# Altium PCB dalang-v1.3_20211125.PcbDoc (part 3 of 5)
Units mil, origin at the board's own origin, x right, y up, seen from the top; angles counter-clockwise.
Board outline 4000 x 3999.92 mil, 4 copper layers (Top, gnd, vcc, Bottom), stack 35.4 mil thick; 365 components, 335 nets, 1640 pads, 1414 vias.
Unrouted connection lines stored in the file: 894.
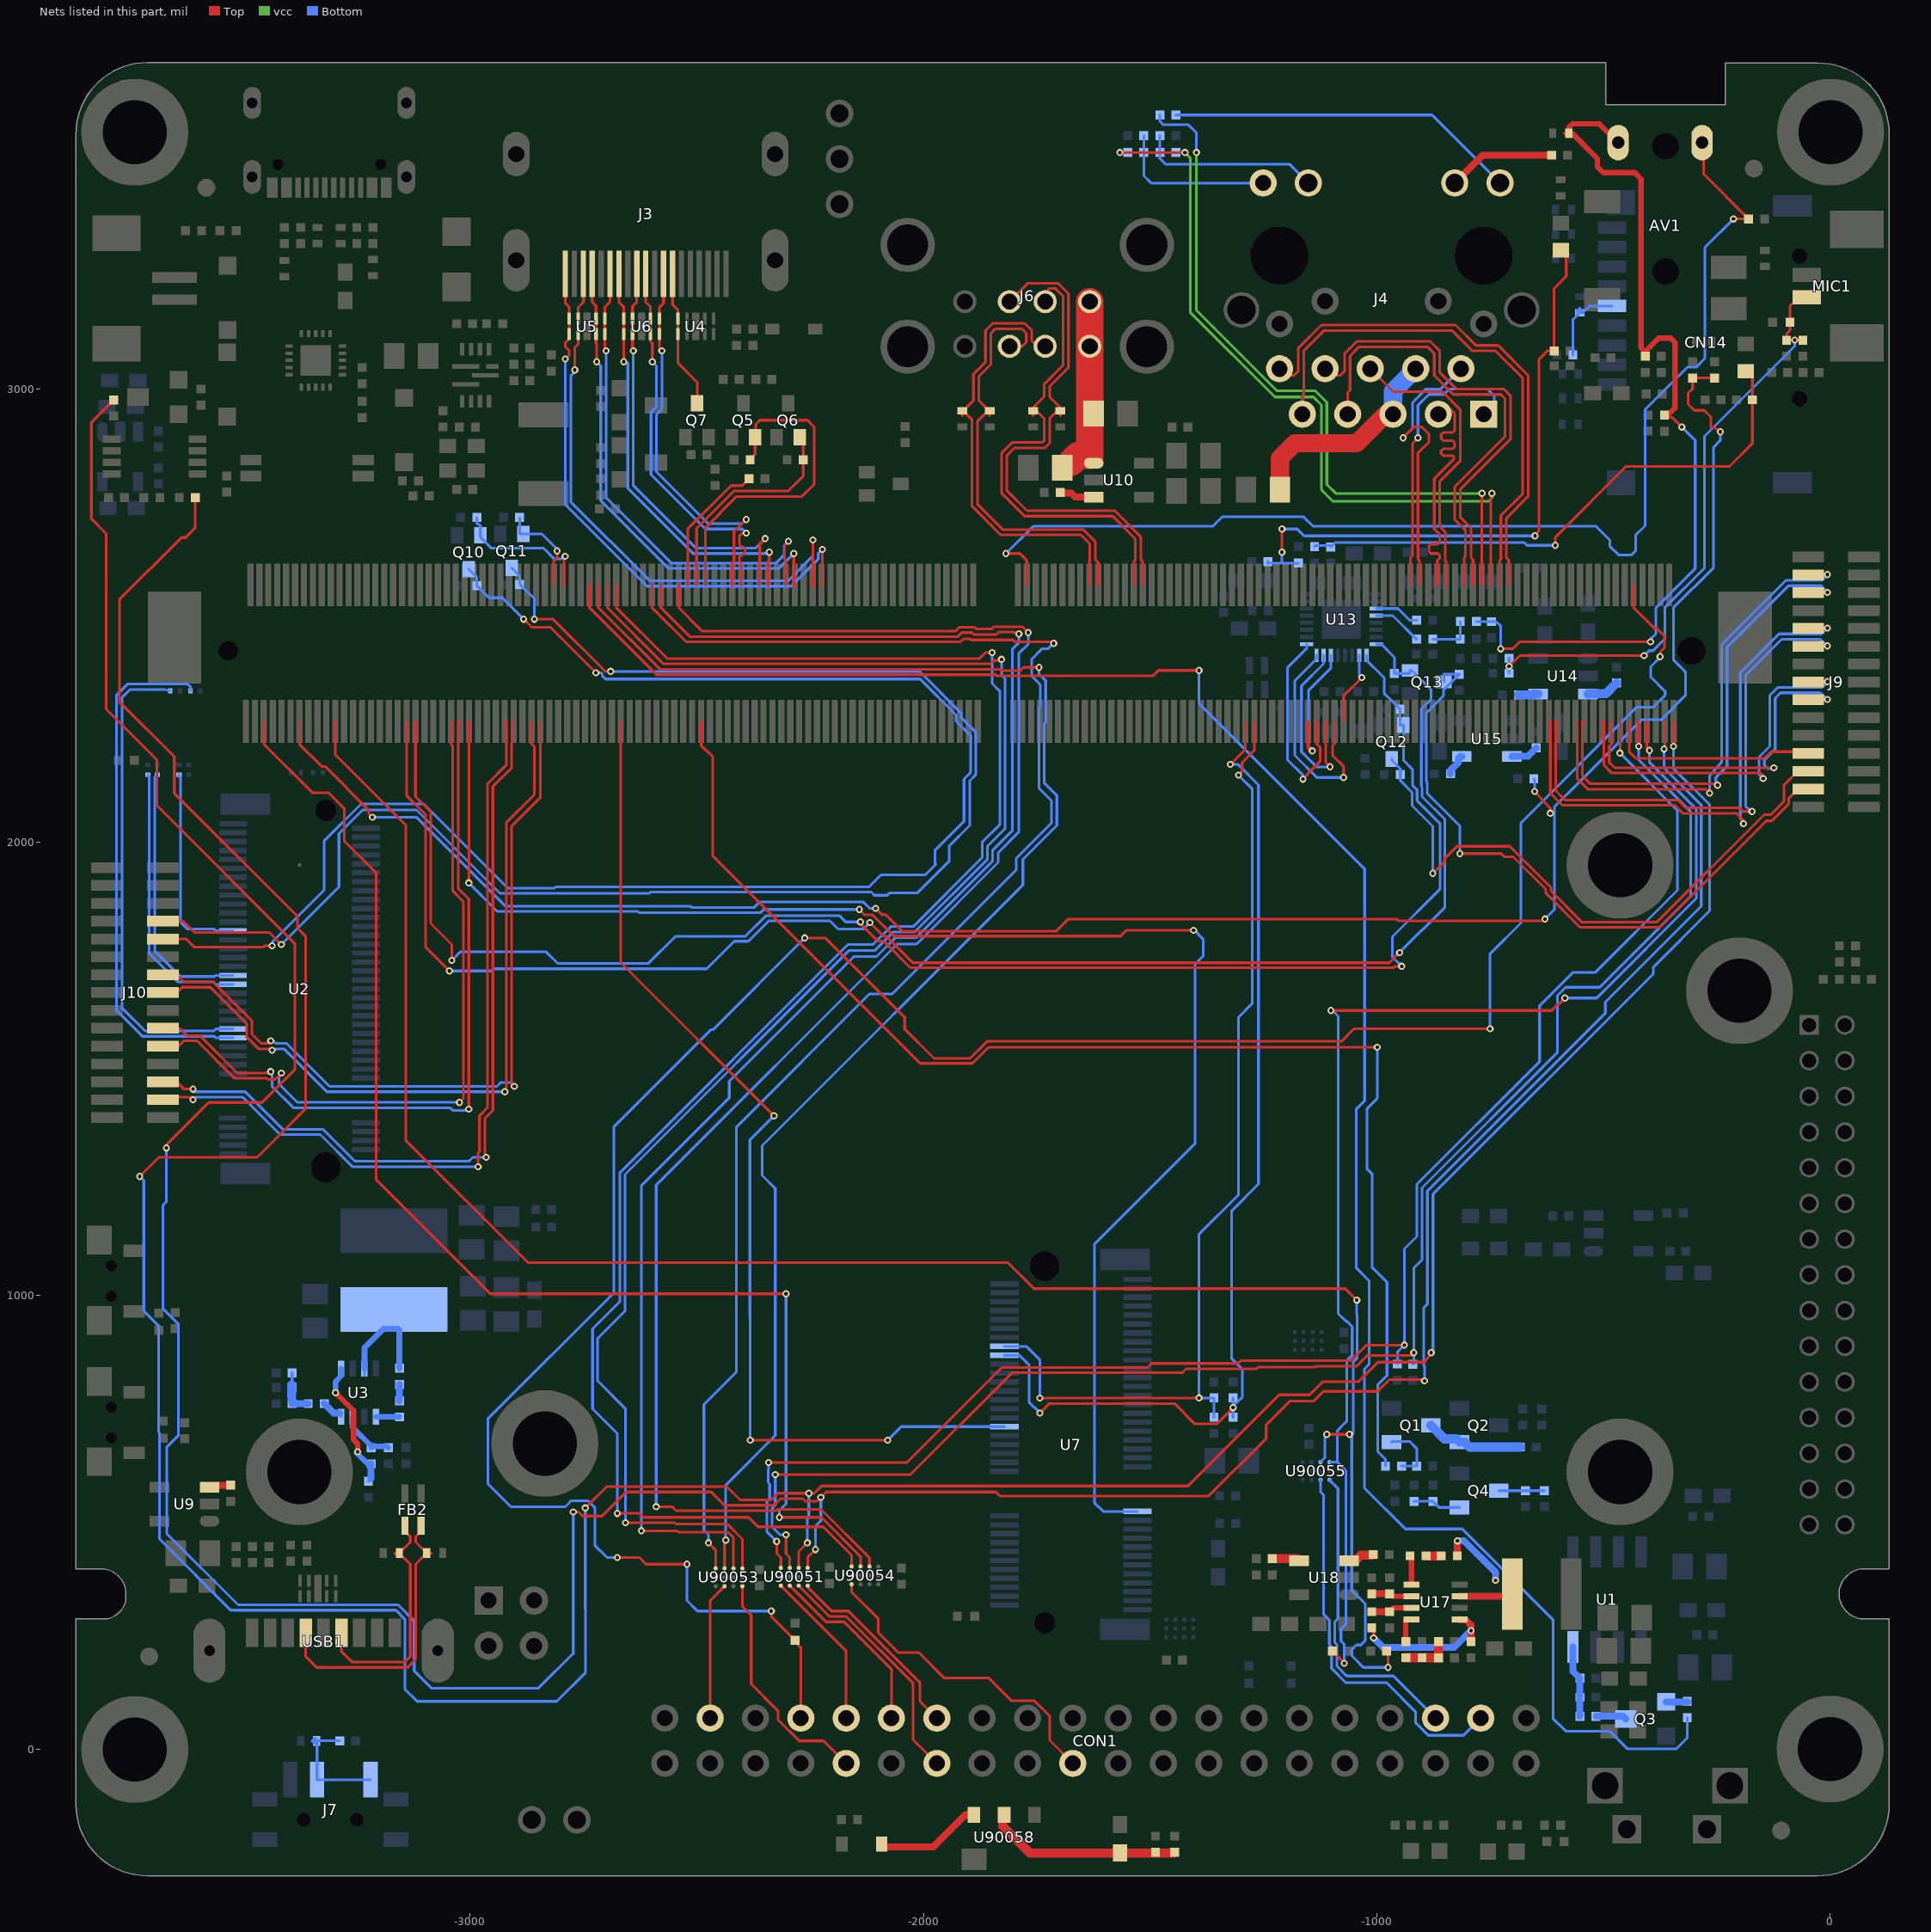
[diagram p4: the nets of this part, all layers, seen from the top]

## Via types
v1: diameter 15.75, hole 7.87, Top to Bottom, 1414 vias

## Nets (pads, with @x,y where several pads share a name; then routed paths per layer and width w, separated by ;. In a path a pad name is that pad's centre, name@x,y a point inside that pad or via, vN(x,y) a via of type N, cw(c..) or ccw(c..) an arc to the next point about the centre after c; other vN are vias at no path point) (continued)
GPIO2_A2: U90053.C3 | length 3533.2
  Top w5.91: v1(-2622.05,481.3) -2543.67,481.3 -2540.72,478.35 -2431.36,478.35 -2419.07,466.06 U90053.C3@-2419.07,398.37 ; -2579.13,2567.72 -2579.13,2517.52 -2515.44,2453.83 -1923.74,2453.83 -1914.97,2462.6 -1893,2462.6 -1888.98,2458.58 -1838.95,2458.58 -1833.87,2463.66 -1802.37,2463.66 -1801.31,2462.6 -1789.37,2462.6 v1(-1789.37,2459.65)
  Bottom w5.91: v1(-2622.05,481.3) -2622.05,1242.71 -2428.35,1436.41 -2428.35,1473.04 -2153.35,1748.03 -2103.38,1748.03 -2062.04,1789.37 -2016.65,1789.37 -1847.24,1958.78 -1847.24,1982.61 -1803.54,2026.31 -1803.54,2426.42 -1789.37,2440.59 v1(-1789.37,2459.65)
GPIO2_A3: U90053.A3 | length 3423.2
  Top w5.91: -2598.82,2567.72 -2598.82,2517.52 -2523.32,2442.02 -1918.41,2442.02 -1911.53,2448.9 -1896.99,2448.9 -1894.49,2446.41 -1802.37,2446.41 -1797.9,2441.93 -1712.6,2441.93 v1(-1712.6,2438.98) ; v1(-2474.41,454.72) -2458.44,438.75 U90053.A3@-2458.44,398.37
  Bottom w5.91: v1(-2474.41,454.72) -2474.41,472.57 -2484.33,482.49 -2484.33,759.98 -2412.4,831.9 -2412.4,1371.98 -2119.03,1665.35 -2068.7,1665.35 -1795.28,1938.77 -1795.28,1964.67 -1717.44,2042.51 -1717.44,2091.81 -1745.13,2119.49 -1745.13,2296.97 -1742.17,2299.92 -1742.17,2347.5 -1760.91,2366.23 -1760.91,2404.19 -1737.93,2427.17 -1724.41,2427.17 v1(-1712.6,2438.98)
GPIO2_A4: U90054.C3 | length 3687.5
  Top w5.91: v1(-2589.57,534.45) -2554.13,534.45 -2545.28,525.59 -2324.18,525.59 -2321.23,528.54 -2225.94,528.54 -2119.09,421.7 U90054.C3@-2119.09,402.56 ; -2539.76,2567.72 -2539.76,2517.52 -2487.89,2465.64 -1929.81,2465.64 -1921.04,2474.41 -1886.84,2474.41 -1882.82,2470.39 -1850.07,2470.39 -1844.99,2475.47 -1781.57,2475.47 v1(-1768.7,2462.6)
  Bottom w5.91: v1(-2589.57,534.45) -2589.57,1243.91 -2057.89,1775.59 -2015.01,1775.59 -1835.04,1955.56 -1835.04,1977.07 -1789.76,2022.35 -1789.76,2416.18 -1768.7,2437.25 v1(-1768.7,2462.6)
GPIO2_A6_D: U90054.B3 | length 2878.9
  Top w5.91: -3455.12,2266.54 -3455.12,2216.34 -3348.23,2109.45 -3312.63,2109.45 -3277.17,2073.98 -3277.17,2002.25 -3207.09,1932.17 -3207.09,1255.57 -2955.45,1003.94 v1(-2303.15,1003.94) ; v1(-2317.91,510.83) -2224.93,510.83 -2138.78,424.68 U90054.B3@-2138.78,402.56
  Bottom w5.91: v1(-2317.91,510.83) -2317.91,525.94 -2303.15,540.7 v1(-2303.15,1003.94)
GPIO2_B4_U: C42.1 R46.2 R47.2 | length 4597.8
  Top w5.91: -2073,1830 -2047.13,1804.13 -1830.71,1804.13 ; v1(-651.57,2112.2) -617.13,2074.8 v1(-617.13,2063.98) ; -265.75,2940.94 -262.59,2937.79 -262.59,2915.14 -255.7,2915.14 v1(-242.13,2905.51)
  Top w6: -3376.38,2266.54 -3376.38,2216.29 -3327.41,2167.32 -3320.06,2167.32 -3223.58,2070.84 -3223.58,2063.15 v1(-3215.55,2055.12) ; v1(-2105.32,1854.33) -2091.43,1840.44 -2083.44,1840.44 -2073,1830 ; -1830.71,1804.13 -1706.69,1804.13 -1680.12,1830.71 -956.29,1830.71 -952.05,1826.47 -635.04,1826.47 -630.8,1830.71 v1(-628.94,1830.71) ; -265.75,2940.94 -277.56,2952.76 -299.21,2952.76 -312.99,2966.54 -312.99,2990.45 -303,3000.45 C42.1@-303,3024.28 R46.2@-255,3024.28
  Bottom w5.91: R47.2@-653.54,2139.76 -651.57,2137.8 v1(-651.57,2112.2) ; v1(-628.94,1830.71) -608.27,1851.38 -608.27,2061.02 ; v1(-617.13,2063.98) -608.27,2061.02 ; -554.33,2131.89 -608.27,2077.95 -608.27,2061.02
  Bottom w6: v1(-3215.55,2055.12) -3118.07,2055.12 -2921.61,1858.66 -2513.29,1858.66 -2510.53,1855.91 -2374.18,1855.91 -2361.98,1868.11 -2132.5,1868.11 -2118.72,1854.33 v1(-2105.32,1854.33) ; -554.33,2131.89 -415.94,2270.27 -372.44,2270.27 -318.9,2323.82 -318.9,2376.21 -345.47,2402.78 -345.47,2517.37 -256.89,2605.95 -256.89,2871.44 -242.13,2886.2 v1(-242.13,2905.51)
GPIO3_D4/I2S0-SDI1: CON1.22 U90054.A1 | length 711.2
  Top w5.91: U90054.A1@-2158.46,363.19 -2158.46,345.97 -2099.41,286.91 -2099.41,256.19 -2055.82,212.6 -2010.08,212.6 -1953.98,156.5 -1855.7,156.5 -1805.5,106.3 -1754.99,106.3 -1721.46,72.77 -1721.46,19.09 CON1.22@-1670.47,-31.89
GPIO3_D4/I2S0_SDI1: U90054.A3 | length 3872.8
  Top w5.91: -2677.56,2567.72 -2677.56,2517.52 -2565.38,2405.34 -1876.14,2405.34 -1863.17,2418.31 v1(-1848.43,2418.31) ; v1(-2675.2,519.68) -2626.48,519.68 -2617.62,510.83 -2385.36,510.83 -2364.69,490.16 -2220.96,490.16 -2158.46,427.66 U90054.A3@-2158.46,402.56
  Bottom w5.91: v1(-2675.2,519.68) -2675.2,695.68 -2729.92,750.4 -2729.92,926.74 -2669.29,987.37 -2669.29,1271.51 -2166.4,1774.41 -2111.43,1774.41 -2071.66,1814.17 -2022.7,1814.17 -1870.08,1966.79 -1870.08,2000.68 -1831.1,2039.66 -1831.1,2332.8 -1848.43,2350.12 v1(-1848.43,2418.31)
GPIO3_D5/I2S0-SDI2: CON1.32 U90053.D1 | length 517.1
  Top w5.91: U90053.D1@-2399.38,359 -2399.38,314.74 -2379.92,295.28 -2379.92,143.39 -2320.87,84.33 -2320.87,64.83 -2273.75,17.72 -2220.08,17.72 CON1.32@-2170.47,-31.89
GPIO3_D5/I2S0_SDI2: U90053.D3 | length 3680.3
  Top w5.91: -2697.24,2567.72 -2697.24,2517.52 -2573.25,2393.53 -1852.53,2393.53 -1845.47,2400.59 -1839.57,2400.59 -1838.58,2401.57 -1827.76,2401.57 v1(-1827.76,2403.54) ; v1(-2657.48,499.02) -2548.23,499.02 -2545.28,496.06 -2432.37,496.06 -2399.38,463.07 U90053.D3@-2399.38,398.37
  Bottom w5.91: v1(-2657.48,499.02) -2657.48,750.89 -2718.83,812.23 -2718.83,905.48 -2658.27,966.04 -2658.27,1267.11 -2164.36,1761.02 -2107.6,1761.02 -2066.26,1802.36 -2019.08,1802.36 -1858.66,1962.79 -1858.66,1991.65 -1820.08,2030.23 -1820.08,2361.12 -1827.76,2368.79 v1(-1827.76,2403.54)
GPIO3_D6/I2S0-SDI3: CON1.37 U90053.B1 | length 304
  Top w5.91: CON1.37@-2470.47,68.11 -2470.47,327.28 U90053.B1@-2438.75,359
GPIO3_D6/I2S0_SDI3: U90053.B3 | length 3416.4
  Top w5.91: -2716.93,2567.72 -2716.93,2517.52 -2581.08,2381.67 -1830.63,2381.67 -1827.82,2378.86 -1786.13,2378.86 -1779.16,2385.83 v1(-1745.08,2385.83) ; U90053.B3@-2438.75,398.37 -2438.75,457.9 v1(-2436.02,460.63)
  Bottom w5.91: v1(-2436.02,460.63) -2436.02,582.19 -2326.77,691.44 -2326.77,1236.27 -2355.83,1265.33 -2355.83,1330.84 -1780.51,1906.16 -1780.51,1962.28 -1705.63,2037.16 -1705.63,2103.21 -1733.32,2130.89 -1733.32,2261.56 -1730.32,2264.56 -1730.32,2356.29 -1745.08,2371.06 v1(-1745.08,2385.83)
GPIO4_D3_1V8: R15.1 | length 4572.9
  Top w6: -2736.61,2567.72 -2736.61,2517.47 -2588.9,2369.76 -1840.81,2369.76 -1838.06,2367 -1494,2367 -1482,2379 v1(-1392,2379)
  Bottom w6: v1(-1392,2379) -1392,2306.34 -1026.77,1941.11 -1026.77,1430.02 -1044.88,1411.91 -1044.88,1060.99 -1016.93,1033.04 -1016.93,848.65 -1027.17,838.41 -1027.17,575.72 -936.88,485.43 -811.51,485.43 -611.02,284.94 -611.02,67.47 -582.93,39.37 -486.14,39.37 -447.17,0.39 -338.79,0.39 -315,24.19 R15.1@-315,69.28
GPIO4_D5: CON1.33 ED25.1 | length 5492.5
  Top w5.91: v1(-2675.2,422.24) -2626.48,422.24 -2611.71,407.48 v1(-2521.65,407.48) ; v1(-2335.63,304.13) -2335.63,291.8 ED25.1@-2283.23,239.41 -2278.43,234.6 -2278.43,231.65 -2270.47,223.69 CON1.33@-2270.47,68.11 ; v1(-2261.81,1788.98) -2216.59,1788.98 -2041.34,1613.72 -2041.34,1588.21 -1976.36,1523.23 -1897.39,1523.23 -1859.6,1561.02 -1078.13,1561.02 -1050.57,1588.58 v1(-750,1588.58) ; -433.46,2567.72 -433.46,2517.52 -388.78,2472.83 -383.46,2472.83 -365.33,2454.7 -365.33,2429.16 -374.02,2420.47 -374.02,2409.45 v1(-375,2409.45)
  Bottom w5.91: v1(-2675.2,422.24) -2697.81,422.24 -2724.8,449.24 -2724.8,532.62 -2739.82,547.64 -2776.67,547.64 -2790.06,534.25 -2909.82,534.25 -2961.02,585.46 -2961.02,728.09 -2682.68,1006.44 -2682.68,1373.17 -2469.28,1586.57 -2464.22,1586.57 v1(-2261.81,1788.98) ; v1(-2521.65,407.48) -2521.65,327.3 -2498.49,304.13 v1(-2335.63,304.13) ; v1(-750,1588.58) -750,1753.94 -682.09,1821.85 -682.09,2042.53 -426.29,2298.33 -389.76,2298.33 -363.73,2324.36 -363.73,2332.68 -395.67,2364.61 -395.67,2387.09 -374.16,2408.6 -373.31,2409.45 v1(-375,2409.45)
HDMI_PORT_CEC: J3.13 Q7.3 U4.1 U4.10 | length 307.8
  Top w6: J3.13@-2553.62,3253.6 -2553.62,3186 -2541.37,3173.75 U4.10@-2541.37,3155.22 U4.1@-2541.37,3120.78 -2541.37,3057 -2499,3014.63 Q7.3@-2499,2968.4
HDMI_TX0N: J3.9 U6.2 U6.9 | length 935.9
  Top w6: v1(-2640,3084) -2641.69,3085.68 U6.2@-2641.69,3120.78 U6.9@-2641.69,3155.22 -2641.69,3182.68 -2632.36,3192 J3.9@-2632.36,3253.6 ; -2362.6,2567.72 -2362.6,2619 -2361,2620.6 -2361,2658 v1(-2349,2670)
  Bottom w6: v1(-2640,3084) -2640,2787 -2502,2649 -2370,2649 v1(-2349,2670)
HDMI_TX0P: J3.7 U6.1 U6.10 | length 932.3
  Top w6: J3.7@-2671.73,3253.6 -2671.73,3192 -2661.37,3181.64 U6.10@-2661.37,3155.22 U6.1@-2661.37,3120.78 -2661,3118.15 v1(-2661,3060) ; -2342.91,2567.72 -2342.91,2619 -2340,2621.91 v1(-2340,2640)
  Bottom w6: v1(-2661,3060) -2661,3057 -2652,3057 -2652,2781 -2508,2637 -2343,2637 v1(-2340,2640)
HDMI_TX1N: J3.6 U5.5 U5.6 | length 1094.2
  Top w6: v1(-2700,3084) -2702.63,3086.63 U5.5@-2702.63,3120.78 U5.6@-2702.63,3155.22 -2702.63,3180.78 -2691.41,3192 J3.6@-2691.41,3253.6 ; -2303.54,2567.72 -2303.54,2622 -2306.54,2625 -2306.54,2655.46 v1(-2298,2664)
  Bottom w6: v1(-2700,3084) -2700,2760 -2556,2616 -2325,2616 -2307,2634 -2307,2655 v1(-2298,2664)
HDMI_TX1P: J3.4 U5.4 U5.7 | length 1086.7
  Top w6: J3.4@-2730.78,3253.6 -2730.78,3192 -2722.32,3183.53 U5.7@-2722.32,3155.22 U5.4@-2722.32,3120.78 -2722.32,3100.32 -2721,3099 v1(-2721,3060) ; v1(-2286,2637) -2286,2563.86 -2283.86,2567.72
  Bottom w6: v1(-2721,3060) -2712,3051 -2712,2754 -2562,2604 -2319,2604 v1(-2286,2637)
HDMI_TX2N: J3.3 U5.2 U5.9 | length 1289.4
  Top w6: v1(-2769,3042) -2769,3091.68 -2761.69,3099 U5.2@-2761.69,3120.78 U5.9@-2761.69,3155.22 -2761.69,3180 -2749.69,3192 -2749.69,3252.81 J3.3@-2750.47,3253.6 ; -2244.49,2567.72 -2244,2562.2 v1(-2244,2667)
  Bottom w6: v1(-2769,3042) -2769,3037.96 -2778,3028.96 -2778,2751 -2604,2577 -2298,2577 -2244,2631 v1(-2244,2667)
HDMI_TX2P: J3.1 U5.1 U5.10 | length 1286.6
  Top w6: v1(-2790,3066) -2781.37,3074.63 -2781.37,3084.37 -2790,3093 -2790,3102 -2781.37,3110.63 U5.1@-2781.37,3120.78 U5.10@-2781.37,3155.22 -2781.37,3180.16 -2789.84,3188.63 J3.1@-2789.84,3253.6 ; -2224.8,2567.72 -2223,2566.52 v1(-2223,2646)
  Bottom w6: v1(-2790,3066) -2790,2745 -2610,2565 -2292,2565 -2232,2625 -2232,2637 v1(-2223,2646)
HDMI_TXCN: J3.12 U6.5 U6.6 | length 863
  Top w6: v1(-2577,3084) -2580,3087 -2582.63,3087 U6.5@-2582.63,3116.43 ; J3.12@-2573.3,3253.6 -2573.3,3188.63 -2582.63,3179.3 U6.6@-2582.63,3155.22 U6.5@-2582.63,3120.78 ; -2421.65,2567.72 -2421.65,2616.89 -2418,2620.55 -2418,2685 v1(-2391,2712) ; U6.5@-2582.63,3116.43 U6.5@-2582.63,3120.78 ; U6.5@-2582.63,3116.43 -2581.42,3115.21 -2581.42,3119.56 U6.5@-2582.63,3120.78
  Bottom w6: v1(-2577,3084) -2577,2955 -2589,2943 -2589,2817 -2475,2703 -2400,2703 v1(-2391,2712)
HDMI_TXCP: J3.10 U6.4 U6.7 | length 861.7
  Top w6: J3.10@-2612.67,3253.6 -2612.67,3192 -2602.32,3181.64 U6.7@-2602.32,3155.22 U6.4@-2602.32,3120.78 -2602.32,3105 -2598,3100.68 v1(-2598,3060) ; -2401.97,2567.72 -2401.97,2616 -2406,2620.03 -2406,2629.5 -2401.5,2634 -2398.5,2634 -2394,2638.5 -2394,2647.5 -2398.5,2652 -2401.5,2652 -2406,2656.5 -2406,2676 -2400,2682 v1(-2391,2682)
  Bottom w6: v1(-2598,3060) -2589,3051 -2589,2961 -2601,2949 -2601,2811 -2481,2691 -2400,2691 v1(-2391,2682)
HOST0_DM: ED11.1 J6.2 | length 1067.6
  Top w5.91: ED11.1@-1758,2951.72 ED11.1@-1758,2959 ; J6.2@-1731.5,3192.52 -1731.5,3213 -1723.04,3221.46 -1708.25,3221.46 -1691.93,3205.13 -1691.93,3052.15 -1733.36,3010.72 -1733.36,2983.64 ED11.1@-1758,2959 ; -1535.83,2567.72 -1535.83,2619.17 -1532.48,2622.52 -1532.48,2669.29 -1582.68,2719.49 -1776.55,2719.49 -1827.76,2770.7 -1827.76,2858.26 -1806.11,2879.91 -1805.98,2879.91 -1803.99,2881.89 -1738.11,2881.89 -1733.36,2886.64 -1733.36,2934.36 -1750.5,2951.5 ED11.1@-1758,2959
HOST0_DP: ED10.1 J6.3 | length 1159.3
  Top w5.91: J6.3@-1810.24,3192.52 -1769.49,3233.27 -1728.07,3233.27 -1727.97,3233.36 -1703.32,3233.36 -1681.58,3211.62 ; ED10.1@-1698,2951.72 ED10.1@-1698,2959 ; -1681.58,3211.58 -1680,3210 -1680,3047.24 -1721.46,3005.79 -1721.46,2982.46 ED10.1@-1698,2959 ; -1516.14,2567.72 -1516.14,2619 -1520.58,2623.43 -1520.58,2669.73 -1520.67,2669.83 -1520.67,2674.18 -1577.79,2731.3 -1771.65,2731.3 -1815.95,2775.59 -1815.95,2853.24 -1799.1,2870.08 -1731.92,2870.08 -1721.46,2880.54 -1721.46,2935.54 -1705,2952 ED10.1@-1698,2959
HOST1_DM: ED13.1 J6.6 | length 975.7
  Top w5.91: ED13.1@-1914,2951.72 -1912.46,2951.72 ED13.1@-1912.4,2951.77 ; J6.6@-1731.5,3094.09 -1749,3094.09 -1761,3106.09 -1761,3129 -1776,3144 -1777.3,3144 -1777.98,3144.68 -1846.02,3144.68 -1846.7,3144 -1848,3144 -1863.19,3128.81 -1863.19,3059.06 -1889.76,3032.48 -1889.76,2974.41 ED13.1@-1912.4,2951.77 ; -1634.25,2567.72 -1634.25,2619.75 -1632.97,2621.03 -1632.97,2658.38 -1652.74,2678.15 -1829.88,2678.15 -1889.91,2738.31 -1892.72,2741.12 -1892.72,2932.09 -1908,2947.37 -1909.5,2948.87 -1910.5,2949.87 ED13.1@-1912.4,2951.77
HOST1_DP: ED12.1 J6.7 | length 949.4
  Top w5.91: ED12.1@-1854,2951.72 -1855.26,2951.72 ED12.1@-1856.3,2952.76 ; J6.7@-1810.24,3094.09 -1782,3094.09 -1773,3103.09 -1773,3123 -1782.87,3132.87 -1841.13,3132.87 -1851.28,3122.72 -1851.28,3054.12 -1877.86,3027.55 -1877.86,2974.32 ED12.1@-1856.3,2952.76 ; -1614.57,2567.72 -1614.57,2617.58 -1621.06,2624.08 -1621.06,2663.31 -1647.71,2689.96 -1824.85,2689.96 -1880.91,2746.02 -1880.91,2928.15 -1861,2948.06 -1859.5,2949.56 ED12.1@-1856.3,2952.76
HOST-5V: C47.1 E1.1 J6.1 J6.5 U10.1 | length 579.2
  Top w6: C47.1@-1693.6,2826 -1693.6,2818.4 C47.1@-1674,2838 ; E1.1@-1633.07,2946 E1.1@-1624.4,2946 E1.1@-1624.12,2946.05 ; U10.1@-1624.12,2836.4 E1.1@-1624.12,2946.05 ; E1.1@-1624.12,2946.05 -1606.4,2949 -1624.12,2949 E1.1@-1624.12,2946.05
  Top w60: C47.1@-1674,2838 -1659,2853 -1633.07,2853 -1633.07,2946 J6.5@-1633.07,3094.09 J6.1@-1633.07,3192.52
HP_IN1N: C61.1 U13.27 | length 100.2
  Bottom w5.91: U13.27@-1000.98,2515.75 -953.23,2515.75 -927.1,2489.62
  Bottom w6: -927.1,2489.62 -912.09,2489.62 C61.1@-911.72,2490
HP_IN1P: C60.1 U13.28 | length 110.8
  Bottom w5.91: U13.28@-1000.98,2500 -964.7,2500 -912.7,2448 C60.1@-911.72,2448
HP_SNS: AV1.2 R40.2 | length 2652.4
  Top w6: v1(-1818,2637) -1787.05,2637 -1772.05,2622 -1772.05,2567.72 ; AV1.2@-282.28,3543.31 -279,3540.02 -279,3474.28 R40.2@-179.72,3375 v1(-213,3375)
  Bottom w6: v1(-1818,2637) -1758,2697 -1362,2697 -1341,2718 -1161,2718 -1140,2697 -516,2697 -486,2667 -486,2653.5 -466.5,2634 -438,2634 -429,2643 -429,2677.27 -408,2698.27 -408,2955 -315,3048 -295.5,3048 -276,3067.5 -276,3312 v1(-213,3375)
HPL: C40.1 R3.1 R45.2 R71.1 | length 1250.9
  Top w6: v1(-606,2655) -606,2673 -450,2829 -222,2829 -171.28,2879.72 C40.1@-171.28,2976 -171.28,3033 -177.28,3039 R45.2@-186,3039
  Bottom w6: R3.1@-1137.28,2652 -1134.57,2654.72 R71.1@-1098,2654.72 ; R71.1@-1101.38,2651.57 R71.1@-1098,2654.72 ; v1(-606,2655) -668.09,2655 -674.09,2661 -1091.72,2661 R71.1@-1098,2654.72
HPR: C41.1 R4.1 R43.2 R72.1 | length 1381.5
  Top w6: v1(-1209,2640) v1(-1209,2691) ; v1(-651,2676) -642,2688 -642,3066 -624,3084 C41.1@-608.72,3084 -608.72,3221.64 -582,3248.35 -582,3294 R43.2@-594,3306
  Bottom w5.91: R4.1@-1240.16,2619.09 -1240.16,2616 -1209,2616 ; v1(-1209,2640) -1209,2616 ; -1189.26,2616 -1209,2616
  Bottom w6: v1(-1209,2691) -1175.25,2691 -1160.25,2676 v1(-651,2676) ; -1189.26,2616 R72.1@-1172.72,2616
I2C1-SCL: J10.5 Q10.3 R127.2 | length 3610.8
  Top w5.91: J10.5@-3678,1786.52 -3626.09,1786.52 -3608.27,1768.7 -3456.35,1768.7 -3453.4,1771.65 v1(-3437.01,1771.65) ; v1(-2881.89,2492.13) -2864.17,2474.41 -2822.83,2474.41 v1(-2722.44,2374.02)
  Bottom w5.91: v1(-3437.01,1771.65) -3439.38,1772.92 -3434.06,1782.9 -3321.85,1895.11 -3321.85,2003.34 -3240.55,2084.65 -3102.34,2084.65 -2916.31,1898.62 -2814.72,1898.62 -2811.77,1901.57 -2119.93,1901.57 -2093.35,1928.15 -1996.06,1928.15 -1972.44,1951.77 -1974.83,1954.16 -1974.83,1981.79 -1910.53,2046.09 -1910.53,2139.75 -1895.67,2154.61 -1895.67,2234.94 -1928.1,2267.37 -1928.1,2280.87 -2007.43,2360.2 -2701.48,2360.2 -2708.74,2367.46 -2708.74,2372.25 -2710.5,2374.02 v1(-2722.44,2374.02) ; Q10.3@-3002.95,2602.36 -2985.24,2584.65 R127.2@-2985.24,2565.94 -2958.66,2539.37 -2929.13,2539.37 v1(-2881.89,2492.13)
I2C1-SDA: J10.4 Q11.3 R129.2 | length 3585.1
  Top w5.91: J10.4@-3678,1825.89 -3632.98,1825.89 -3608.27,1801.18 -3442.91,1801.18 v1(-3416.34,1774.61) ; v1(-2858.27,2492.13) -2817.06,2492.13 -2701.9,2376.97 v1(-2689.96,2376.97)
  Bottom w5.91: v1(-3416.34,1774.61) -3289.37,1901.57 -3289.37,2019.12 -3237.23,2071.26 -3118.07,2071.26 -2934.21,1887.4 -2604.64,1887.4 -2601.88,1890.16 -2114.79,1890.16 -2107.71,1883.07 -2079.93,1883.07 -2074.42,1888.58 -2013.03,1888.58 -1942.91,1958.7 -1942.91,1991.92 -1897.64,2037.19 -1897.64,2135.9 -1884.65,2148.89 -1884.65,2243.47 -1916.93,2275.76 -1916.93,2285.12 -2008.78,2376.97 v1(-2689.96,2376.97) ; Q11.3@-2908.46,2605.31 -2890.75,2587.6 R129.2@-2890.75,2568.9 -2889.91,2568.9 -2858.27,2537.25 v1(-2858.27,2492.13)
I2C1_SCL: Q10.2 R126.2 | length 324.9
  Top w5.91: -2795.67,2567.72 -2792.63,2567.72 -2792.63,2630.91 v1(-2790.35,2630.91)
  Bottom w5.91: R126.2@-2985.24,2716.54 -2985.24,2703.74 -2983.27,2701.77 -2981.3,2701.77 -2977.36,2697.83 Q10.2@-2977.36,2677.17 -2977.36,2673.23 -2952.76,2648.62 -2837.6,2648.62 -2813.98,2625 -2799.76,2625 v1(-2790.35,2630.91)
I2C1_SDA: Q11.2 R128.2 | length 216.1
  Top w5.91: -2815.35,2567.72 -2815.35,2620.67 -2808.07,2627.95 v1(-2808.07,2642.72)
  Bottom w5.91: R128.2@-2890.75,2716.54 -2890.75,2680.12 Q11.2@-2882.87,2680.12 -2841.97,2680.12 -2806.32,2644.47 v1(-2808.07,2642.72)
I2C2-SCL: CON1.28 U90051.C1 | length 540
  Top w5.91: U90051.C1@-2275.16,360.18 -2207.3,292.32 -2170.24,292.32 -2022.64,144.72 -2022.64,20.28 CON1.28@-1970.47,-31.89
I2C2-SDA: CON1.27 U90051.D1 | length 431.3
  Top w5.91: U90051.D1@-2255.47,360.18 -2252.81,354.53 -2202.41,304.13 -2165.34,304.13 -2007.87,146.66 -2007.87,105.51 CON1.27@-1970.47,68.11
I2C2_SCL: R99.2 U90051.C3 | length 8297.8
  Top w5.91: v1(-3729,1263) -3686.88,1305.12 -3469.49,1305.12 -3419.29,1355.31 ; v1(-2746.06,531.5) -2698.82,578.74 -2433.75,578.74 -2404.22,549.21 -2336.45,549.21 -2321.69,563.98 v1(-2252.95,563.98) ; U90051.C3@-2275.16,399.55 -2275.16,435.47 v1(-2255.91,454.72) ; v1(-345.47,2211.61) -344.88,2212.2 -344.88,2266.54
  Top w6: R99.2@-3606.28,2760 -3606.28,2693.98 -3628.02,2672.24 -3636.72,2672.24 -3773.62,2535.34 -3773.62,2309.93 -3652.56,2188.87 -3652.56,2108.03 -3380.91,1836.38 -3380.91,1810.72 -3363,1792.82 -3363,1411.61 -3419.29,1355.31 ; v1(-2252.95,563.98) -2241.02,563.98 -2224.76,580.24 -1416.29,580.24 -1215.42,781.1 -1148.03,781.1 -1119.29,809.84 -1040.64,809.84 -997.13,853.35 -893.7,853.35 v1(-879.92,874.02)
  Bottom w5.91: v1(-2255.91,454.72) -2255.91,507.87 -2252.95,510.83 v1(-2252.95,563.98)
  Bottom w6: v1(-3729,1263) -3720,1254 -3720,966 -3687,933 -3687,699 -3685.22,697.22 -3685.22,463.22 -3528,306 -3163.5,306 -3144,286.5 -3144,132 -3117,105 -2809.06,105 -2745.2,168.86 -2745.2,308.6 -2746.06,309.46 v1(-2746.06,531.5) ; v1(-879.92,874.02) -876,874.02 -876,1223.88 -389.76,1710.12 -389.76,1725.1 -265.75,1849.12 -265.75,2082.87 -345.47,2162.6 v1(-345.47,2211.61)
I2C2_SDA: R100.2 U90051.D3 | length 8340.6
  Top w5.91: v1(-2772.64,522.64) -2760.7,522.64 -2751.84,513.78 -2708.86,513.78 -2655.71,566.93 -2468.19,566.93 -2438.66,537.4 -2329.6,537.4 -2314.84,552.17 -2265.75,552.17 -2259.84,546.26 -2235.24,546.26 v1(-2226.38,555.12) ; U90051.D3@-2255.47,399.55 -2255.47,422.68 v1(-2238.19,439.96)
  Top w6: R100.2@-3786,2975.72 -3835.63,2926.09 -3835.63,2713.58 -3803.15,2681.1 -3803.15,2294.29 -3690.94,2182.09 -3690.94,2081.25 -3386.81,1777.12 -3386.81,1498.22 -3458.85,1426.18 -3576.44,1426.18 -3670.28,1332.35 v1(-3670.28,1325.79) ; v1(-2226.38,555.12) -2214.57,566.93 -1840.24,566.93 -1831.38,558.07 -1370.59,558.07 -1243.86,684.8 -1243.86,714.8 -1190.94,767.72 -1138.78,767.72 -1117.62,788.88 -998.03,788.88 -971.95,814.96 -900.59,814.96 -899.11,813.48 -896.16,813.48 v1(-894.69,812.01) ; v1(-366.14,2205.71) -364.57,2207.28 -364.57,2266.54
  Bottom w5.91: v1(-2238.19,439.96) -2238.19,491.63 -2226.38,503.44 v1(-2226.38,555.12)
  Bottom w6: v1(-3670.28,1325.79) -3670.28,1206.54 -3678,1198.82 -3678,972 -3643.7,937.7 -3643.7,690.94 -3669.29,665.35 -3669.29,475.45 -3511.84,318 -3158.66,318 -3123.39,282.73 -3123.39,172.21 -3085.39,134.2 -2849.41,134.2 -2773.97,209.65 -2772.64,209.65 v1(-2772.64,522.64) ; v1(-894.69,812.01) -894.69,844.61 -896.06,845.98 -896.06,973.75 -888.19,981.62 -888.19,1230.63 -495.67,1623.15 -495.67,1647.44 -284.25,1858.86 -284.25,2082.06 -366.14,2163.95 v1(-366.14,2205.71)
I2C3_SCL_HDMI_1V8: Q5.2 R28.2 | length 754
  Top w6: -2480.71,2567.72 -2480.71,2694.29 -2412,2763 -2268,2763 -2241,2790 -2241,2916 -2256,2931 -2361,2931 -2370,2922 -2370,2895.01 Q5.2@-2371.41,2893.6 -2371.41,2856 -2382.28,2845.13 R28.2@-2382.28,2844
I2C3_SDA_HDMI_1V8: Q6.2 R30.2 | length 496.3
  Top w6: -2500.39,2567.72 -2500.39,2692.61 -2418,2775 -2298.28,2775 -2265.28,2808 R30.2@-2265.28,2844 -2265.28,2886.47 Q6.2@-2272.41,2893.6
I2C4-SCL: J9.3 Q12.3 R132.2 | length 1379.9
  Top w5.91: v1(-876.38,1931.5) -850.54,1957.33 -850.54,1963.57 -822.78,1991.34 -706.72,1991.34 -615.75,1900.37 -615.75,1892.37 -547,1823.62 -382.74,1823.62 -145.34,2061.02 -130.59,2061.02 -101.97,2089.65 -101.97,2125.9 -71.13,2156.74 J9.3@-48,2156.74
  Bottom w5.91: Q12.3@-966.54,2183.86 -966.54,2180.91 -948.03,2162.4 R132.2@-948.03,2149.61 -948.03,2136.09 -921.95,2110.01 -921.95,2080.95 -876.38,2035.37 v1(-876.38,1931.5)
I2C4-SDA: J9.2 Q13.3 R134.2 | length 1481.6
  Top w5.91: v1(-816.54,1975.2) -725.59,1975.2 -718.5,1968.11 -698.91,1968.11 -626.77,1895.97 -626.77,1887.97 -551.4,1812.6 -375.09,1812.6 -140.45,2047.24 -128.95,2047.24 -90.94,2085.25 -90.94,2097.56 -71.13,2117.37 J9.2@-48,2117.37
  Bottom w5.91: Q13.3@-851.97,2353.94 -851.97,2370.67 -851.77,2370.87 R134.2@-817.72,2370.87 -852.36,2336.22 -852.36,2323.62 -890.51,2285.48 -890.51,2133.19 -888.98,2131.65 -888.98,2108.34 -816.54,2035.9 v1(-816.54,1975.2)
I2C4_SCL: Q12.2 R131.2 U13.1 | length 3579.5
  Top w5.91: -3120.47,2266.54 -3120.47,2100.82 -3087.01,2067.36 -3087.01,1820.9 -3040.55,1774.44 v1(-3040.55,1739.37) ; v1(-2138.98,1824.41) -2140.73,1822.66 -2099.96,1781.89 -2089.86,1781.89 -2089.46,1781.5 -2087.08,1781.5 -2028.81,1723.23 -963.26,1723.23 -960.11,1726.38 v1(-944.88,1726.38)
  Bottom w5.91: v1(-3040.55,1739.37) -3021.65,1758.27 -2832.34,1758.27 -2807.14,1733.07 -2606.43,1733.07 -2546.98,1792.52 -2392.94,1792.52 -2347.67,1837.8 -2184.59,1837.8 -2171.21,1824.41 v1(-2138.98,1824.41) ; U13.1@-1022.64,2412.4 -1022.64,2402.17 -983.86,2363.39 -983.86,2328.91 -967.37,2312.42 -967.15,2312.42 R131.2@-948.43,2293.7 -948.43,2258.66 Q12.2@-940.94,2258.66 -940.94,2180.91 -921.26,2161.22 -921.26,2125.86 -911.02,2115.63 -911.02,2091.89 -860.55,2041.41 -860.55,1896.54 -965.43,1791.65 -965.43,1746.93 v1(-944.88,1726.38)
I2C4_SDA: Q13.2 R133.2 U13.32 | length 3636
  Top w5.91: -3140.16,2266.54 -3140.16,2103.03 -3098.03,2060.9 -3098.03,1768.5 v1(-3045.67,1716.14) ; v1(-2118.11,1822.83) -2088,1792.72 -2082.11,1792.72 -2023.64,1734.25 -972.05,1734.25 v1(-949.61,1756.69)
  Bottom w5.91: v1(-3045.67,1716.14) -2951.55,1716.14 -2946.82,1720.87 -2478.03,1720.87 -2417.33,1781.57 -2386.21,1781.57 -2341.07,1826.71 -2206.35,1826.71 -2188.22,1808.58 -2132.36,1808.58 v1(-2118.11,1822.83) ; U13.32@-1000.98,2437.01 -990,2437.01 -961.02,2408.03 R133.2@-961.02,2372.44 -926.77,2372.44 Q13.2@-926.77,2379.53 -922.83,2379.53 -879.92,2336.61 -879.92,2315.6 -901.42,2294.1 -901.42,2123.99 -900,2122.58 -900,2100.81 -849.65,2050.46 -849.65,1856.65 v1(-949.61,1756.69)
I2C6-SCL: CON1.29 U90051.B1 | length 408.5
  Top w5.91: U90051.B1@-2294.84,360.18 -2215.18,280.51 -2175.13,280.51 -2070.47,175.85 CON1.29@-2070.47,68.11
I2C6-SDA: CON1.31 U90051.A1 | length 351.7
  Top w5.91: U90051.A1@-2314.53,360.18 -2170.47,216.12 CON1.31@-2170.47,68.11
I2C6_SCL: R59.1 U90051.B3 | length 3518.5
  Top w5.91: v1(-2326.77,605.31) -2028.94,605.31 -1804.53,829.72 -1429.29,829.72 -1420.43,838.58 -1264.77,838.58 -1260.79,842.56 -1135.83,842.56 -1133.9,844.49 -1044.09,844.49 -1020.47,868.11 -924.21,868.11 v1(-918.31,874.02) ; v1(-2303.15,472.44) -2303.15,430.7 -2294.84,422.39 U90051.B3@-2294.84,399.55 ; -423.62,2220.47 -422.24,2219.09 v1(-422.24,2211.61)
  Top w6: -423.62,2220.47 -423.62,2266.54
  Bottom w5.91: v1(-2326.77,605.31) -2326.77,538.07 -2333.74,531.1 -2333.74,489.51 -2316.67,472.44 v1(-2303.15,472.44) ; R59.1@-920.52,848.72 -918,848.72 v1(-918.31,874.02) ; -601.49,1653.54 -601.49,1662.03 -583.41,1680.12 -507.87,1680.12 -307.09,1880.91 -307.09,2066.93 -422.24,2182.09 v1(-422.24,2211.61)
  Bottom w6: v1(-918.31,874.02) -918.31,1060.49 -900,1078.8 -900,1237.76 -601.49,1536.26 -601.49,1653.54
I2C6_SDA: R60.1 U90051.A3 | length 3514.4
  Top w5.91: v1(-2341.54,631.89) -2036.9,631.89 -1827.25,841.54 -1506.13,841.54 -1497.27,850.39 -1306.3,850.39 -1300.4,856.3 -1057.14,856.3 -1022.44,891 v1(-939,891) ; v1(-2323.82,457.68) -2323.82,431.68 -2314.53,422.39 U90051.A3@-2314.53,399.55
  Top w6: v1(-463.58,2196.85) -462.99,2197.44 -462.99,2266.54
  Bottom w5.91: v1(-2341.54,631.89) -2341.54,616.04 -2342.6,614.98 -2342.6,587.87 -2339.17,584.44 -2339.17,551.41 -2345.55,545.03 -2345.55,479.41 v1(-2323.82,457.68) ; R60.1@-954.49,849.07 -954.49,875.51 v1(-939,891) ; -640.75,1632.87 -640.75,1639.48 -567.63,1712.6 -518.36,1712.6 -336.93,1894.03 -336.93,2070.2 v1(-463.58,2196.85)
  Bottom w6: v1(-939,891) -939,1103.12 -911.42,1130.7 -911.42,1245.68 -640.75,1516.35 -640.75,1632.87
I2C7-CLK/GPIO2_B0: CON1.5 U90055.A1 | length 688.3
  Bottom w5.91: U90055.A1@-1104.33,593.5 -1085.55,574.72 -1085.55,287.61 -1092.52,280.64 -1092.52,235.11 -1087.8,230.39 -1087.8,182.54 -1066.25,160.99 -963.35,160.99 CON1.5@-870.47,68.11
I2C7-SDA/LID#: CON1.3 U90055.B1 | length 846
  Bottom w5.91: U90055.B1@-1124.02,593.5 -1124.02,567.07 -1117.63,560.68 -1117.63,297.4 -1104.4,284.17 -1104.4,230.22 -1099.73,225.55 -1099.73,177.77 -1067.95,145.99 -977.98,145.99 -914.57,82.58 -914.57,58.53 -886.19,30.16 -808.43,30.16 CON1.3@-770.47,68.11
I2C7_CLK/GPIO2_B0: R57.1 U90055.A3 | length 2890.8
  Top w5.91: -614.17,1629 -602.15,1641.02 -600.12,1641.02 v1(-584.65,1656.5)
  Top w6: v1(-1101,1629) -614.17,1629 ; R57.1@-1097.72,216 -1097.72,215.71 -1098.01,215.71 -1071.56,189.27 v1(-1071.85,188.98) ; -403.94,2266.54 -403.94,2208.07 v1(-398.62,2202.76)
  Bottom w5.91: U90055.A3@-1104.33,632.87 -1086.61,632.87 ; -1071.85,617.13 -1071.85,618.11 -1086.61,632.87 ; -1071.85,717.52 -1086.61,702.76 -1086.61,632.87 ; v1(-584.65,1656.5) -514.79,1656.5 -295.28,1876.01 -295.28,2073.84 -398.62,2177.18 v1(-398.62,2202.76)
  Bottom w6: v1(-1101,1629) -1097.9,1629 -1085.04,1616.14 -1085.04,960.59 -1067.76,943.31 -1065.86,943.31 -1054.08,931.53 -1054.08,868.69 -1065.75,857.03 -1065.75,723.62 -1071.85,717.52 ; v1(-1071.85,188.98) -1071.85,231.35 -1078.87,238.37 -1078.87,264.59 -1067.79,275.67 -1067.79,613.06 -1071.85,617.13
I2C7_SDA/LID#: R58.1 U90055.B3 | length 4306.1
  Top w5.91: v1(-1110.24,693.9) v1(-1060.04,693.9)
  Top w6: -3297.64,2266.54 -3297.64,2193.59 -3142.13,2038.08 -3142.13,1342.83 -2872.13,1072.83 -1813.58,1072.83 -1756.1,1015.35 -1069.35,1015.35 v1(-1044,990) ; R58.1@-978.28,216 -975,212.72 v1(-975,180)
  Bottom w5.91: U90055.B3@-1124.02,632.87 -1114.67,642.22 -1114.67,690.94 -1113.19,690.94 v1(-1110.24,693.9)
  Bottom w6: v1(-1060.04,693.9) -1060.04,690.94 v1@-1057.09,690.94 ; v1(-1044,990) -1044,958.06 -1043.08,957.15 -1043.08,862.49 -1051.97,853.61 -1051.97,696.06 v1@-1057.09,690.94 ; v1(-975,180) -1029.22,180 -1055.24,206.02 -1055.24,219.17 -1045.12,229.3 -1035.25,229.3 -1025.13,239.42 -1025.13,319.75 -1055.06,349.68 -1055.06,688.91 v1@-1057.09,690.94
I2C8_SCL: R33.1 R35.2 U7.60 | length 2169.4
  Top w5.91: v1(-1305,2148) -1305,2148.39 -1297.07,2156.32
  Top w6: v1(-1743,774) -1742.72,774.28 v1(-1392,774.28) ; -1297.07,2156.32 -1297.07,2175.76 -1270.08,2202.76 -1270.08,2266.54
  Bottom w6: U7.60@-1821.46,888.19 -1773,888.19 -1743,858.19 v1(-1743,774) ; R35.2@-1359,731.72 R33.1@-1359,774.28 v1(-1392,774.28) -1392,1135.5 -1305,1222.5 -1305,1614 -1275,1644 -1275,2118 v1(-1305,2148)
I2C8_SDA: R34.1 R36.2 U7.58 | length 2291
  Top w5.91: v1(-1323,2172) -1322.41,2172 -1289.76,2204.65 -1289.76,2214.57
  Top w6: v1(-1743,741) -1722,762 -1446,762 -1401,717 -1353,717 v1(-1317,753) ; -1289.76,2214.57 -1289.76,2266.54
  Bottom w6: U7.58@-1821.46,868.51 -1788,868.51 -1767,847.51 -1767,765 v1(-1743,741) ; v1(-1323,2172) -1306.55,2172 -1260.83,2126.28 -1260.83,1246.23 -1319.88,1187.17 -1319.88,860.83 -1296.26,837.2 -1296.26,776.58 -1307.78,765.06 -1311,761.84 -1317,761.84 ; R36.2@-1317,731.72 v1(-1317,753) -1317,761.84 ; R34.1@-1317,774.28 -1317,761.84
I2S0_LRCK_RX: U13.8 | length 503.5
  Top w5.91: -1092.91,2266.54 -1092.91,2218.11 -1097.24,2213.78 -1097.24,2191.34 -1073.23,2167.32 v1(-1073.23,2142.91)
  Bottom w5.91: U13.8@-1132.87,2412.4 -1132.87,2404.33 -1180.71,2356.5 -1180.71,2191.73 -1131.89,2142.91 v1(-1073.23,2142.91)
I2S0_SCLK: U13.6 | length 316.9
  Top w5.91: -1151.97,2266.54 -1151.97,2207.87 -1140.94,2196.85 -1139.65,2200.75 -1139.37,2201.57 v1(-1142.13,2201.57)
  Bottom w5.91: v1(-1142.13,2201.57) -1142.13,2202.36 -1142.52,2202.76 -1142.52,2202.95 -1150.79,2211.22 -1150.79,2334.45 -1101.38,2383.86 U13.6@-1101.38,2412.4
I2S0_SDI0: U13.9 | length 475.3
  Top w5.91: v1(-1162.6,2139.37) -1153.54,2148.43 -1153.54,2149.61 -1125.2,2177.95 -1125.2,2209.84 -1132.28,2216.93 -1132.28,2266.54
  Bottom w5.91: v1(-1162.6,2139.37) -1162.6,2147.64 -1197.24,2182.28 -1197.24,2384.65 -1154.53,2427.36 U13.9@-1154.53,2437.01
I2S0_SDO0: U13.7 | length 413.7
  Top w5.91: -1112.6,2266.54 -1112.6,2176.38 -1103.15,2166.93 v1(-1103.15,2166.54)
  Bottom w5.91: U13.7@-1117.13,2412.4 -1117.13,2393.7 -1166.14,2344.68 -1166.14,2199.61 -1133.07,2166.54 v1(-1103.15,2166.54)
I2S_CLK: U13.2 | length 167.4
  Top w5.91: -1073.23,2266.54 -1073.23,2322.83 v1(-1032.68,2363.39)
  Bottom w5.91: U13.2@-1038.39,2412.4 -1038.39,2364.96 -1034.25,2364.96 v1(-1032.68,2363.39)
IR_IN: D2.2 U90058.1 | length 235.9
  Top w6: D2.2@-2092.1,-210 D2.2@-2088,-216
  Top w15.75: D2.2@-2088,-216 -1978.35,-216 -1907.48,-145.13 -1888.92,-145.13 U90058.1@-1888.78,-145.28
IR_VCC: C86.2 C87.2 R78.1 U90058.2 | length 435.9
  Top w20: U90058.2@-1821.85,-145.28 -1822.74,-146.16 -1826.28,-146.16 -1824.8,-147.64 -1824.8,-170.24 -1765.75,-229.3 C86.2@-1566.2,-229.3 ; C86.2@-1566,-229.5 C86.2@-1566.2,-229.3 ; C87.2@-1488,-227.72 C87.2@-1489.58,-229.3 ; R78.1@-1446,-227.72 -1447.58,-229.3 C87.2@-1489.58,-229.3 ; C86.2@-1566.2,-229.3 -1566,-229.3 C87.2@-1489.58,-229.3
LAN_LED0: R90547.2 R90555.2 | length 1702.3
  Top w5.91: v1(-1566.93,3521.65) v1(-1423.23,3521.65) ; -748.43,2567.72 -748.43,2767.72 v1(-746.06,2769.68)
  vcc w5.91: v1(-1423.23,3521.65) -1411.42,3509.84 -1411.42,3169.29 -1224.41,2982.28 -1139.76,2982.28 -1122.05,2964.57 -1122.05,2777.56 -1096.46,2751.97 -753.94,2751.97 -746.06,2759.84 v1(-746.06,2769.68)
  Bottom w5.91: v1(-1566.93,3521.65) R90555.2@-1549.21,3521.65 ; R90547.2@-1442.91,3521.65 v1(-1423.23,3521.65)
LAN_LED1: R90544.2 | length 1602.1
  Top w5.91: -768.11,2567.72 -768.11,2769.29 v1(-767.72,2769.68)
  vcc w5.91: v1(-1397.64,3521.65) -1397.64,3173.23 -1220.47,2996.06 -1135.83,2996.06 -1110.24,2970.47 -1110.24,2789.37 -1090.55,2769.68 v1(-767.72,2769.68)
  Bottom w5.91: R90544.2@-1478.35,3604.33 -1478.35,3590.55 -1470.47,3582.68 -1415.35,3582.68 -1397.64,3564.96 v1(-1397.64,3521.65)
LCD1_BKLT_EN: R12.1 | length 2945.2
  Top w6: -2490.55,2266.54 -2490.55,2214.17 -2464.57,2188.19 -2464.57,1969.28 -2007.49,1512.2 -1892.08,1512.2 -1856.29,1548 v1(-999,1548)
  Bottom w6: v1(-999,1548) -999,1434.57 -1021.65,1411.91 -1021.65,1279.65 -1009.84,1267.84 -1009.84,1061.92 -977.36,1029.44 -977.36,823.52 -998.03,802.85 -998.03,656.38 -980.72,639.07 R12.1@-980.72,624
LDC0_VDD_EN: U7.23 | length 3489.4
  Top w6: v1(-3002.95,1910.43) -3002.95,1913.39 -3002.36,1930.51 -3002.36,2266.54 ; v1(-2141.34,1851.97) -2129.13,1839.76 -2112.11,1839.76 -2065.26,1792.91 -1565.16,1792.91 -1552.07,1806 v1(-1404,1806)
  Bottom w6: v1(-3002.95,1910.43) -2940.16,1847.64 -2630.32,1847.64 -2627.56,1844.88 -2359.16,1844.88 -2352.08,1851.97 v1(-2141.34,1851.97) ; U7.23@-1528.15,524.02 -1603.5,524.02 -1623,543.52 -1623,1113 -1401,1335 -1401,1731 -1383,1749 -1383,1786.5 -1402.5,1806 v1(-1404,1806)
LDC1_VDD_EN: U7.42 | length 2320.8
  Top w6: -2667.72,2266.54 -2667.72,1734.65 v1(-2329.72,1396.65) ; v1(-2382,681) v1(-2079,681)
  Bottom w6: v1(-2382,681) -2382,953.36 -2382.69,954.05 -2382.69,1343.69 v1(-2329.72,1396.65) ; v1(-2079,681) -2049,711.02 U7.42@-1821.46,711.02
LED-L+: J4.15 R90544.1 | length 777.1
  Bottom w5.91: R90544.1@-1442.91,3604.33 -877.95,3604.33 J4.15@-727.95,3454.33
LED-L-: J4.16 R90541.1 | length 239.2
  Top w15.75: J4.16@-827.95,3454.33 -766.54,3515.75 R90541.1@-614.17,3515.75
LED-R+: J4.17 R90547.1 R90556.1 | length 400.7
  Bottom w5.91: R90556.1@-1478.35,3559.06 -1478.35,3523.62 R90547.1@-1478.35,3521.65 -1478.35,3508.27 -1466.14,3496.06 -1192.52,3496.06 J4.17@-1150.79,3454.33
LED-R-: J4.18 R90545.1 R90555.1 | length 358.5
  Bottom w5.91: R90545.1@-1513.78,3559.06 -1513.78,3470.08 -1498.03,3454.33 J4.18@-1250.79,3454.33
MCLK_OUT: J9.4 | length 475.8
  Top w5.91: -443.31,2266.54 -443.31,2199.8 -428.54,2185.04 -144.69,2185.04 -129.92,2199.8 -63.47,2199.8 -59.77,2196.11 J9.4@-48,2196.11
MDI0+: J4.1 | length 642.4
  Top w6: -925.59,2567.72 -925.59,2628 -921,2632.59 -921,2880 v1(-909,2892)
  Bottom w6: v1(-909,2892) -909,2964 -885,2988 -852,2988 -840,3000 -756,3000 -741,2985 -741,2967.66 J4.1@-764.17,2944.49
MDI0-: J4.2 | length 642
  Top w6: v1(-942,2892) -918,2916 -900,2916 -885,2901 -885,2883 -909,2859 -909,2625 -905.91,2621.91 -905.91,2567.72
  Bottom w6: v1(-942,2892) -921,2913 -921,2970 -891,3000 -858.66,3000 J4.2@-814.17,3044.49
MDI1+: J4.3 | length 583.4
  Top w6: -866.54,2567.72 -866.54,2621.57 -861,2627.1 -861,2632.5 -865.5,2637 -880.5,2637 -885,2641.5 -885,2653.5 -880.5,2658 -865.5,2658 -861,2662.5 -861,2679 -873,2691 -873,2802 -829.7,2845.3 -829.7,2850.2 -832.5,2853 -853.5,2853 -858,2857.5 -858,2863.5 -853.5,2868 -832.5,2868 -828,2872.5 -828,2881.5 -832.5,2886 -853.5,2886 -858,2890.5 -858,2899.5 -853.5,2904 -832.5,2904 -828,2908.5 -828,2946 -837,2955 -853.66,2955 J4.3@-864.17,2944.49
MDI1-: J4.6 | length 647
  Top w6: J4.6@-1014.17,3044.49 -963.69,2994 -855,2994 -816,2955 -816,2841 -861,2796 -861,2697 -849,2685 -849,2622 -846.85,2619.85 -846.85,2567.72
MDI2+: J4.7 | length 1024.8
  Top w6: J4.7@-1064.17,2944.49 -1064.17,2991.83 -1059,2997 -1059,3072.83 -1038.83,3093 -888,3093 -873,3078 -873,3030 -831,2988 -726,2988 -717,2979 -717,2895 -828,2784 -828,2712 -804,2688 -804,2631 -807.48,2627.52 -807.48,2567.72
MDI2-: J4.8 | length 1024.3
  Top w6: J4.8@-1114.17,3044.49 -1114.17,3042 -1105.17,3030 -1080,3030 -1071,3039 -1071,3078 -1044,3105 -882,3105 -861,3084 -861,3036 -825,3000 -720,3000 -705,2985 -705,2889 -816,2778 -816,2717.4 -792,2693.4 -792,2627.74 -787.8,2623.53 -787.8,2567.72
MDI3+: J4.9 | length 1163.3
  Top w6: J4.9@-1164.17,2944.49 -1164.17,2985 -1161,2988.17 -1161,3084 -1116,3129 -834,3129 -789,3084 -738,3084 -678,3024 -678,2769 -726,2721 -726,2625 -728.74,2622.26 -728.74,2567.72
MDI3-: J4.10 | length 1163.4
  Top w6: J4.10@-1214.17,3044.49 -1214.17,3039 -1205.17,3030 -1182,3030 -1173,3039 -1173,3090 -1122,3141 -826.21,3141 -781.21,3096 -732,3096 -666,3030 -666,2763 -714,2715 -714,2627.4 -709.06,2622.45 -709.06,2567.72
MIC1_IN: C79.1 ED15.1 MIC1.1 R1.2 R70.2 R75.2 | length 1376.5
  Top w5.91: ED15.1@-88.36,3147 ED15.1@-88.36,3149.61
  Top w6: v1(-708,2388) -684.19,2411.81 v1(-410.24,2411.81) ; ED15.1@-88.36,3147 -88.36,3129 -96,3121.36 C79.1@-96,3107.72 R75.2@-60,3107.72 -59.72,3108 v1(-78,3108) ; ED15.1@-88.36,3149.61 -88.36,3183 -70.36,3201 -52.54,3201 MIC1.1@-51.18,3202.36
  Bottom w6: R1.2@-708.28,2373 R70.2@-708.28,2406 -708,2406.28 v1(-708,2388) ; v1(-410.24,2411.81) -399.23,2422.81 -390.63,2422.81 -364.57,2448.88 -364.57,2517.54 -277.17,2604.94 -277.17,2895.44 -78,3094.61 v1(-78,3108)
MIC2_IN: AV1.5 ED4.1 R2.2 R41.1 R42.2 R66.2 | length 2026.2
  Top w6: v1(-726.38,2426.77) -700.14,2426.77 -684.92,2442 v1(-396,2442) ; R42.2@-407.72,3072 R42.2@-407.72,3080.2 ; R41.1@-365.35,2942.13 -354.4,2936.91 -347.91,2936.91 v1(-327,2916)
  Top w11.81: AV1.5@-467.32,3543.31 -508.66,3584.65 -568.41,3584.65 -576.28,3576.77 -576.28,3571 -576.28,3569.5 ED4.1@-576.28,3564 -569,3564 -512.99,3507.99 -512.99,3489.76 -500.39,3477.17 -430.71,3477.17 -416.93,3463.39 -416.93,3090.55 -408.27,3081.89 ; R42.2@-407.72,3080.2 -407.72,3081.34 -408.27,3081.89 ; R41.1@-365.35,2942.13 -358.19,2942.13 -342.05,2958.27 -342.05,3102.68 -351.57,3112.2 -377.95,3112.2 -408.27,3081.89
  Bottom w5.91: -736.22,2486.72 -726.38,2476.87 v1(-726.38,2426.77) ; v1(-396,2442) -396,2448.24 -384,2460.24
  Bottom w6: R66.2@-780.28,2487 R2.2@-747,2486.72 -736.22,2486.72 ; -384,2460.24 -384,2517.37 -297.37,2604 -297.37,2886.37 v1(-327,2916)
MIPI_RX0_CLKN: J9.8 | length 845.5
  Top w5.91: -502.36,2266.54 -499.02,2266.54 -499.02,2170.28 -481.3,2152.56 -153.54,2152.56 -147.64,2146.65 v1(-147.64,2140.75) ; J9.8@-48,2353.59 -6.65,2353.59 v1(-5.91,2354.33)
  Bottom w5.91: v1(-147.64,2140.75) -156.5,2149.61 -156.5,2187.99 -132.87,2211.61 -132.87,2323.82 -115.16,2341.54 -17.72,2341.54 v1(-5.91,2354.33)
MIPI_RX0_CLKP: J9.7 | length 812.8
  Top w5.91: -482.68,2266.54 -482.68,2226.38 -482.76,2226.3 -481.3,2224.84 -481.3,2217.52 -487.2,2211.61 -487.2,2176.18 -475.39,2164.37 v1(-124,2164.37) ; J9.7@-48,2314.22 -6.65,2314.22 v1(-5.91,2314.96)
  Bottom w5.91: v1(-124,2164.37) -125.13,2162.12 -136.68,2162.12 -144.69,2170.12 -144.69,2182.09 -121.06,2205.71 -121.06,2317.91 -109.25,2329.72 -21.65,2329.72 v1(-5.91,2314.96)
MIPI_RX0_D0N: J9.14 | length 1112.8
  Top w5.91: -561.42,2266.54 -558.07,2266.54 -558.07,2140.75 -534.45,2117.13 -274.61,2117.13 v1(-265.75,2108.27) ; J9.14@-48,2589.81 -6.65,2589.81 v1(-5.91,2590.55)
  Bottom w5.91: v1(-265.75,2108.27) -265.75,2146.29 -239.17,2176.12 -239.17,2436.02 -97.44,2577.76 -17.72,2577.76 v1(-5.91,2590.55)
MIPI_RX0_D0P: J9.13 | length 1073.7
  Top w5.91: -541.73,2266.54 -546.26,2266.54 -546.26,2146.65 -528.54,2128.94 -250.98,2128.94 v1(-248.03,2125.98) ; J9.13@-48,2550.44 -6.65,2550.44 v1(-5.91,2551.18)
  Bottom w5.91: v1(-248.03,2125.98) -251.99,2129.94 -251.99,2142.69 -227.36,2167.32 -227.36,2430.12 -91.54,2565.94 -19.69,2565.94 v1(-5.91,2551.18)
MIPI_RX0_D1N: J9.11 | length 1230.5
  Top w5.91: -620.47,2266.54 -617.13,2266.54 -617.13,2108.27 -590.55,2081.69 -342.52,2081.69 -324.8,2063.98 -206.69,2063.98 -191.14,2048.43 -191.14,2041.14 v1(-191,2041) ; J9.11@-48,2471.7 -6.65,2471.7 v1(-5.91,2472.44)
  Bottom w5.91: v1(-191,2041) -191,2046.26 -197.83,2053.09 -197.83,2374.02 -112.2,2459.65 -19.69,2459.65 v1(-5.91,2472.44)
MIPI_RX0_D1P: J9.10 | length 1177.9
  Top w5.91: -600.79,2266.54 -605.32,2266.54 -605.32,2114.17 -584.65,2093.5 -335.67,2093.5 -317.96,2075.79 -199.72,2075.79 -191.93,2068 v1(-172,2068) ; J9.10@-48,2432.33 -6.65,2432.33 v1(-5.91,2433.07)
  Bottom w5.91: v1(-172,2068) -186.02,2078.74 -186.02,2368.44 -106.63,2447.83 -21.65,2447.83 v1(-5.91,2433.07)
MIPI_TX0_CLKN: J10.11 | length 1619.8
  Top w5.91: J10.11@-3678,1550.3 -3643.7,1550.3 -3631.99,1562.01 -3602.36,1562.01 -3519.69,1479.33 -3448.82,1479.33 -3446.26,1476.77 -3430.71,1476.77 v1(-3416.34,1491.14) ; -3041.73,2266.54 -3041.73,2215.24 -3038.39,2211.89 -3038.39,1892.39 -3014.76,1868.77 -3014.76,1435.04 v1(-3023.62,1426.18)
  Bottom w5.91: v1(-3416.34,1491.14) -3415.69,1491.14 -3421.59,1485.24 -3421.59,1466.87 -3380.91,1426.18 v1(-3023.62,1426.18) ; v1(-3023.62,1426.18) -3023.62,1424.7 v1@-3021.41,1422.49 ; v1(-3023.62,1426.18) -3023.62,1427.13 -3021.41,1424.91 v1@-3021.41,1422.49 ; v1@-3021.41,1422.49 -3020.67,1421.75 -3021.41,1421.01 v1@-3021.41,1422.49
MIPI_TX0_CLKP: J10.10 | length 1643.4
  Top w5.91: J10.10@-3678,1589.67 -3639.58,1588.58 -3624.81,1573.82 -3596.46,1573.82 -3513.78,1491.14 -3442.91,1491.14 v1(-3439.96,1494.09) ; -3022.05,2266.54 -3026.57,2266.54 -3026.57,1898.62 -3002.95,1875 v1(-3002.95,1411.42)
  Bottom w5.91: v1(-3439.96,1494.09) -3437.01,1494.09 -3437.01,1461.61 -3389.83,1414.43 -3044.28,1414.43 -3038.39,1408.54 -3002.95,1408.54 v1(-3002.95,1411.42)
MIPI_TX0_D0N: J10.8 | length 1725.3
  Top w5.91: J10.8@-3678,1668.41 -3678,1674.21 -3640.75,1674.21 -3634.84,1680.12 -3572.83,1680.12 -3493.11,1600.39 -3493.11,1570.87 -3466.54,1544.29 -3437.01,1544.29 v1(-3437.01,1541.34) ; v1(-2923.23,1449.8) -2920.28,1461.61 -2920.28,2043.31 -2858.27,2105.31 -2858.27,2211.22 -2864.57,2217.52 -2864.57,2266.54
  Bottom w5.91: v1(-3437.01,1541.34) -3434.06,1544.29 -3410.43,1544.29 -3315.94,1449.8 v1(-2923.23,1449.8)
MIPI_TX0_D0P: J10.7 | length 1743
  Top w5.91: J10.7@-3678,1707.78 -3678,1703.74 -3642.93,1703.74 -3631.12,1691.93 -3566.93,1691.93 -3481.3,1606.3 -3481.3,1576.77 -3460.63,1556.1 -3445.87,1556.1 v1(-3439.96,1562.01) ; v1(-2902.56,1461.61) -2902.56,1463.6 -2908.46,1469.51 -2908.46,2035.83 -2844.88,2099.41 -2844.88,2266.54
  Bottom w5.91: v1(-3439.96,1562.01) -3434.06,1562.01 -3428.15,1556.1 -3404.53,1556.1 -3310.04,1461.61 -2940.94,1461.61 -2932.09,1470.47 -2911.42,1470.47 v1(-2902.56,1461.61)
MIPI_TX0_D1N: J10.14 | length 1781.2
  Top w5.91: J10.14@-3678,1432.19 -3649.61,1432.19 -3643.8,1437.99 -3611.22,1437.99 v1(-3611.22,1432.09) ; v1(-2982.28,1284.45) -2982.28,1314.73 -2979.33,1317.68 -2979.33,1396.65 -2961.61,1414.37 -2961.61,2128.94 -2920.28,2170.28 -2920.28,2266.54 -2923.62,2266.54
  Bottom w5.91: v1(-3611.22,1432.09) -3605.32,1437.99 -3501.97,1437.99 -3419.29,1355.31 -3330.71,1355.31 -3259.84,1284.45 v1(-2982.28,1284.45)
MIPI_TX0_D1P: J10.13 | length 1783.1
  Top w5.91: J10.13@-3678,1471.56 -3646.65,1471.56 -3630.8,1455.71 v1(-3611.22,1455.71) ; v1(-2964.57,1305.12) -2967.52,1308.07 -2967.52,1390.75 -2949.8,1408.46 -2949.8,2123.03 -2908.46,2164.37 -2908.46,2218.38 -2905.51,2221.33 -2905.51,2266.54 -2903.94,2266.54
  Bottom w5.91: v1(-3611.22,1455.71) -3611.22,1449.8 -3496.06,1449.8 -3413.39,1367.13 -3324.8,1367.13 -3253.94,1296.26 -3002.95,1296.26 -2994.09,1305.12 v1(-2964.57,1305.12)
N07891: R5.2 | length 304.6
  Top w6: -2520.08,2567.72 -2520,2567.8 -2520,2691 -2424,2787 -2399.72,2787 R5.2@-2384.72,2802
N21502: Q3.3 R13.2 | length 68.2
  Bottom w15: R13.2@-516.28,72 -456.56,72 Q3.3@-450.56,66
N21534: C10.2 R9.2 R13.1 U1.4 | length 159.5
  Bottom w15: U1.4@-567,225 -567,171 -566.72,171 C10.2@-551.72,156 R9.2@-551.72,114 R13.1@-551.72,72
N21566: Q3.1 R15.2 | length 49.3
  Bottom w15: Q3.1@-361.5,104 -313.72,104 R15.2@-315,104.72
N22164: Q1.1 R12.2 R14.2 | length 135
  Bottom w6: Q1.1@-967.31,676.6 -965.91,678 -926.72,678 -911.72,663 R14.2@-911.72,624 R12.2@-945.28,624
N22296: Q1.3 Q2.1 R11.1 | length 216.9
  Bottom w20: Q1.3@-880.69,714 -850.69,684 -824.71,684 Q2.1@-817.31,676.6 -805.6,676.6 -795,666 R11.1@-683.72,666
N22422: Q4.1 R19.2 R20.2 | length 106.4
  Bottom w6: R19.2@-918,546.28 R20.2@-876,546.28 -862.32,532.6 Q4.1@-817.31,532.6
N22584: Q4.3 R17.1 R18.2 | length 100.8
  Bottom w6: Q4.3@-730.69,570 -730.41,569.72 R18.2@-672,569.72 R17.1@-630,569.72
N31363: C37.2 J4.4 J4.5 | length 479.5
  Top w40: C37.2@-1213.6,2778 -1213.6,2847 -1180.6,2880 -1044,2880 -979.51,2944.49 J4.5@-964.17,2944.49
  Bottom w40: J4.5@-964.17,2944.49 -964.17,2994.49 J4.4@-914.17,3044.49
N49360: C88.1 L2.1 U17.3 | length 334.7
  Top w15: C88.1@-822.28,426 -822.28,458.72 v1(-822,459) ; U17.3@-816.85,336.8 -700.96,336.8 L2.1@-700.96,342
  Top w20: L2.1@-700.96,342 L2.1@-700.96,391.96
  Bottom w15: v1(-822,459) -807,459 -738,390 v1(-738,372)
N49400: R87.1 U17.8 | length 61.7
  Top w12: R87.1@-936,236.72 -936,285.61 U17.8@-923.15,285.61
N49404: C89.1 R85.2 R87.2 R90.1 | length 108.3
  Top w6: R85.2@-867,201.28 R85.2@-863.72,201
  Top w20: R87.2@-936,201.28 R85.2@-867,201.28 ; R85.2@-863.72,201 C89.1@-863.72,237
N49452: C91.2 R86.2 U17.7 | length 91.4
  Top w12: C91.2@-972,302.72 -963.52,311.2 U17.7@-923.15,311.2
  Top w15: R86.2@-1011,302.72 C91.2@-972,302.72
N49496: R83.1 R84.1 U17.6 | length 90.1
  Top w12: R84.1@-972,342.28 -966.52,336.8 U17.6@-923.15,336.8
  Top w15: R83.1@-1011,342.28 R84.1@-972,342.28
N49508: R86.1 R88.1 U17.1 | length 331.3
  Top w6: R86.1@-1011,267.28 -1006.89,267.28 v1(-1006.89,245.08)
  Top w15: U17.1@-816.85,285.61 -816.24,285 -804,285 -792,273 v1(-792,261) R88.1@-792,236.72
  Bottom w15: v1(-1006.89,245.08) -986.22,224.41 -828.59,224.41 v1(-792,261)
N49516: R82.2 U17.5 | length 65.1
  Top w12: R82.2@-926.72,426 -923.15,422.43 U17.5@-923.15,362.39
N49520: C88.2 R82.1 | length 33.6
  Top w20: R82.1@-891.28,426 C88.2@-857.72,426
N51733: R93.2 U18.3 | length 58.8
  Top w20: U18.3@-1060.88,415.4 -1047,415.4 -1035,427.4 -1009.32,427.4 R93.2@-1007.72,429
N51777: C96.1 U18.4 | length 61.1
  Top w20: C96.1@-1230.28,420 -1175.72,420 U18.4@-1171.12,415.4
N56532: ED9.1 FB2.3 USB1.3 | length 521.3
  Top w6: USB1.3@-3283.86,256.3 -3283.86,214.86 -3261,192 -3144,192 -3132,204 -3132,407.72 ED9.1@-3156.28,432 -3132,456.28 -3132,468.28 -3143.72,480 FB2.3@-3143.72,492.57
N56544: ED8.1 FB2.2 USB1.2 | length 631.8
  Top w6: USB1.2@-3362.6,256.3 -3362.6,204 -3338.6,180 -3138,180 -3120,198 -3120,407.72 ED8.1@-3095.72,432 -3120,456.28 -3120,468.28 -3108.28,480 FB2.2@-3108.28,492.57
N57295: R50.1 U9.3 | length 48.7
  Top w15: U9.3@-3574.88,577.4 -3570.57,581.72 R50.1@-3528,581.72
N59267: R51.1 U10.3 | length 78.5
  Top w15: R51.1@-1698.28,2772 -1696.88,2770.6 -1674,2770.6 -1665,2761.6 U10.3@-1624.12,2761.6
N16414353: CN14.5 ED19.1 R77.2 | length 177
  Bottom w5.91: -567.28,3120.08 -567.28,3153 ED19.1@-552,3168.28 -546,3168.28 -545.28,3168.28 ED19.1@-545,3168
  Bottom w6: R77.2@-567.28,3075 -567.28,3120.08 ; ED19.1@-545,3168 -544.5,3168.5 -530,3183 CN14.5@-480.93,3183.07 CN14.5@-480.93,3183.07
N16420690: ED14.1 J7.1 J7.2 R54.2 | length 258.9
  Bottom w5.91: ED14.1@-3338.58,17.72 ED14.1@-3338.58,18
  Bottom w6: R54.2@-3287.72,18 -3338.58,18 -3341,18 -3339.65,16.65 -3337.8,14.8 -3337.8,10.72 J7.2@-3337.8,-67.91 J7.1@-3219.69,-67.91
N16473532: C21.1 L1.1 U3.3 | length 241
  Bottom w5.91: U3.3@-3233.2,824 U3.3@-3233.2,839.15
  Bottom w13: U3.3@-3233.2,839.15 -3233.2,884.75 -3190.95,927 -3159,927 -3156,924 C21.1@-3156,839.72
N16473602: R25.1 U3.8 | length 52.3
  Bottom w6: U3.8@-3288.14,741.14 -3284.39,737.39 U3.8@-3284.39,732.85
  Bottom w15: R25.1@-3321.85,761.81 -3301.18,741.14 -3301.18,741 -3288.28,741 U3.8@-3288.14,741.14
N16473606: C22.1 R23.2 R25.2 R27.1 | length 139.6
  Bottom w5.91: C22.1@-3393.28,803.15 -3392.72,803.72 R23.2@-3392.72,829.72 ; R27.1@-3392.72,761.81 C22.1@-3392.72,797.24
  Bottom w15: -3393.28,777 -3393.28,761.81 R27.1@-3392.72,761.81 R25.2@-3357.28,761.81
  Bottom w20: -3393.28,777 C22.1@-3393.28,803.15
N16473656: C24.2 R24.2 U3.7 | length 124.8
  Bottom w12: U3.7@-3258.8,732.85 -3258.8,708.66 -3218.5,668.37 R24.2@-3218.5,667.32 ; R24.2@-3218.5,664.37 R24.2@-3218.5,667.32 ; C24.2@-3180.12,664.37 -3183.07,667.32 R24.2@-3218.5,667.32
N16473718: R24.1 R26.1 U3.1 | length 301.3
  Top w12: v1(-3297,786) -3256.89,745.89 -3256.89,682.09 -3248.03,673.23 v1(-3248.03,655.51)
  Bottom w5.91: R26.1@-3224.41,590.55 R26.1@-3218.5,596.46 ; R24.1@-3222.31,625.13 R24.1@-3218.5,628.94
  Bottom w12: v1(-3297,786) -3297,810 -3284.39,822.61 U3.1@-3284.39,839.15 ; v1(-3248.03,655.51) v1@-3250.36,653.18 ; R24.1@-3222.31,625.13 v1@-3250.36,653.18 ; v1@-3250.36,653.18 -3250.98,653.81 -3250.98,652.56 v1@-3250.36,653.18
  Bottom w15: R26.1@-3218.5,596.46 R24.1@-3218.5,628.94
N16473726: R22.2 U3.5 | length 51.8
  Bottom w12: U3.5@-3207.61,732.85 -3156.57,732.85 R22.2@-3156,732.28
N16473730: C21.2 R22.1 | length 36.6
  Bottom w15: R22.1@-3156,767.72 C21.2@-3156,804.28
N16559868: C60.2 R66.1 R69.1 | length 99.6
  Bottom w6: C60.2@-876.28,2448 R69.1@-815.72,2448 R66.1@-815.72,2487
N16560685: R73.2 U14.3 | length 73
  Bottom w20: U14.3@-534,2327.26 -533.26,2328 -494.28,2328 R73.2@-471,2351.28
N16560729: C77.1 U14.4 | length 44
  Bottom w20: C77.1@-687.28,2325 -656.26,2325 -654,2327.26 U14.4@-644.24,2327.26
N16560887: R76.2 U15.3 | length 61.9
  Bottom w15: U15.3@-702,2189.26 -700.98,2190.28 -666,2190.28 R76.2@-648,2208.28
N16560947: C82.1 U15.4 | length 51.7
  Bottom w15: C82.1@-837.28,2151 -837.28,2158.46 -819.57,2176.18 -819.57,2185.68 -814.96,2190.28 -813.26,2190.28 U15.4@-812.24,2189.26
N16561476: C20.2 U2.49 | length 1162.6
  Bottom w6: C20.2@-3616.83,2334 -3616.83,2343 -3622.83,2349 -3756,2349 -3780,2325 -3780,1629 -3723,1572 -3564.5,1572 -3561,1568.5 U2.49@-3523.03,1568.5
N16561480: C19.2 U2.47 | length 1065.8
  Bottom w6: C19.2@-3661.83,2334 -3673.83,2337 -3750,2337 -3768,2319 -3768,1635 -3717,1584 -3565.19,1584 -3561,1588.19 U2.47@-3523.03,1588.19
N16561604: C18.2 U2.37 | length 608.7
  Bottom w6: C18.2@-3711,2149.17 -3711,2148 -3708,2145 -3708,1755 -3645,1692 -3566.39,1692 -3561,1686.61 U2.37@-3523.03,1686.61
N16561608: C17.2 U2.35 | length 588.2
  Bottom w6: C17.2@-3690,2149.17 -3696,2143.17 -3696,1761 -3639,1704 -3564,1704 -3561.7,1706.3 U2.35@-3523.03,1706.3
N16561732: C16.2 U2.25 | length 452.1
  Bottom w6: C16.2@-3642,2149.17 -3642,2144.11 -3639,2144.11 -3639,1824 -3624,1809 -3565.28,1809 -3561,1804.72 U2.25@-3523.03,1804.72